# EAGLE board 120W-AB-Amplifier_alt (EAGLE 9.6.2)
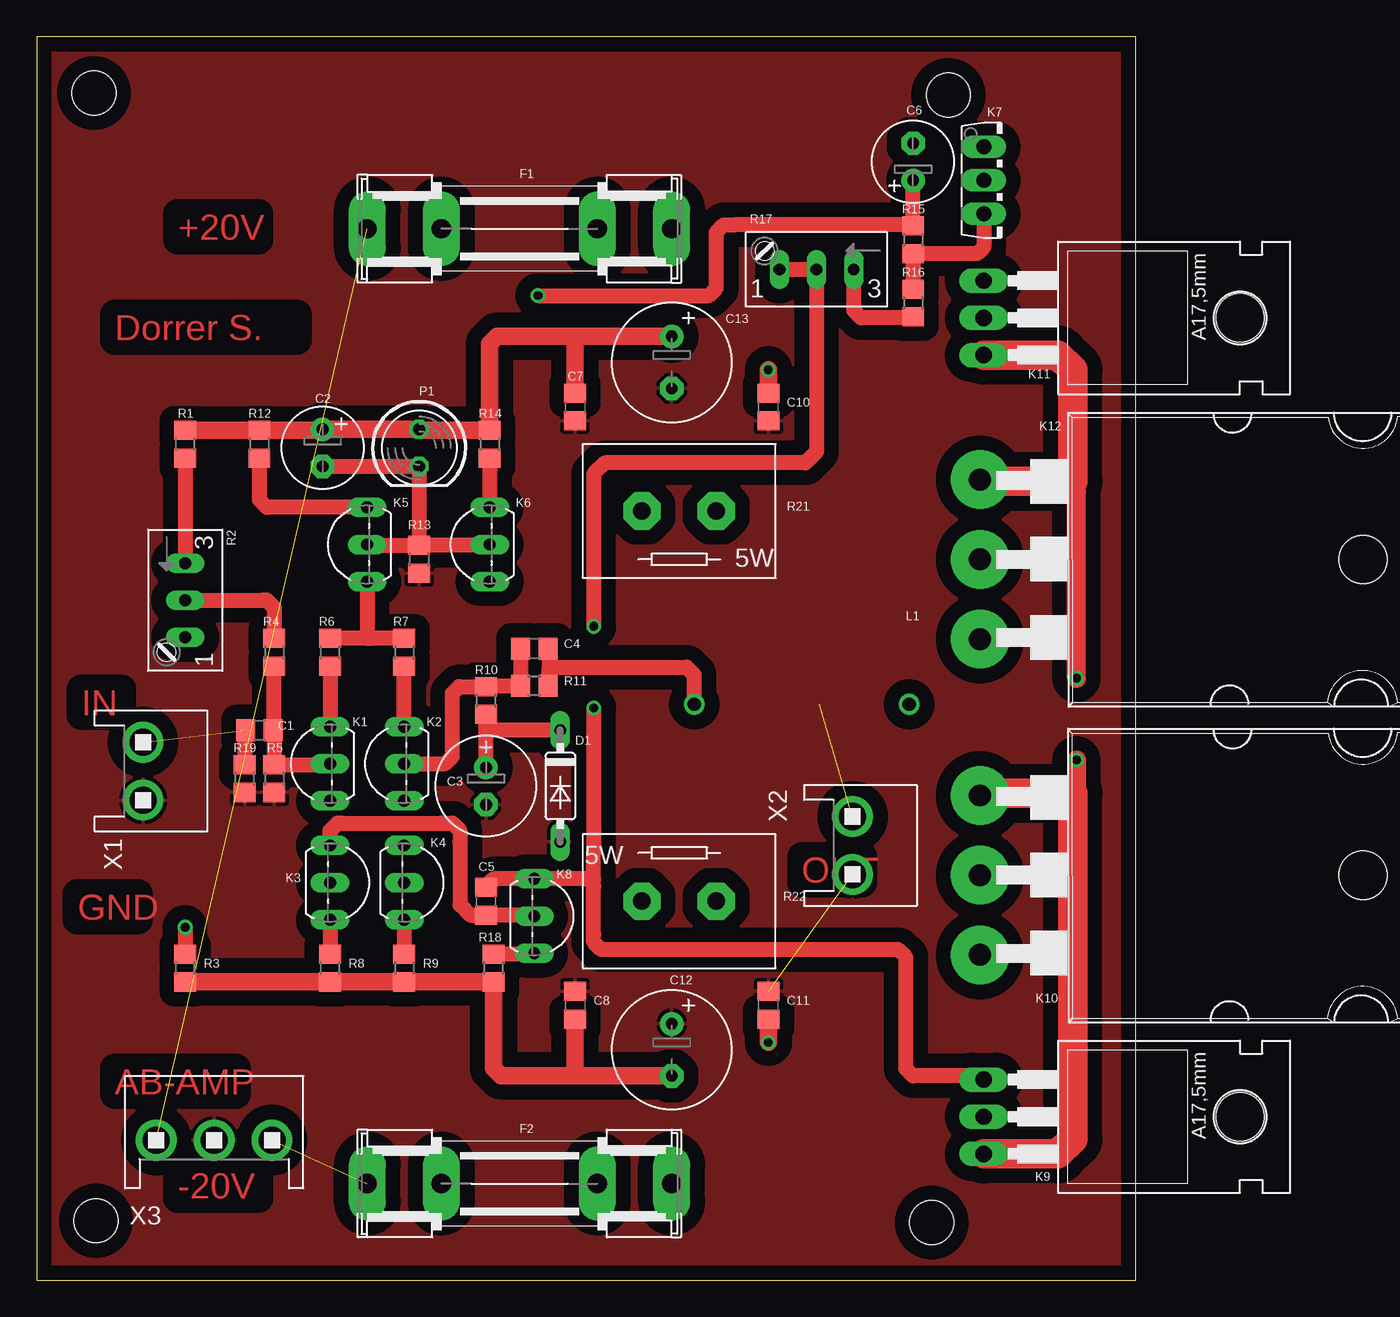
[diagram p0: board, top side]
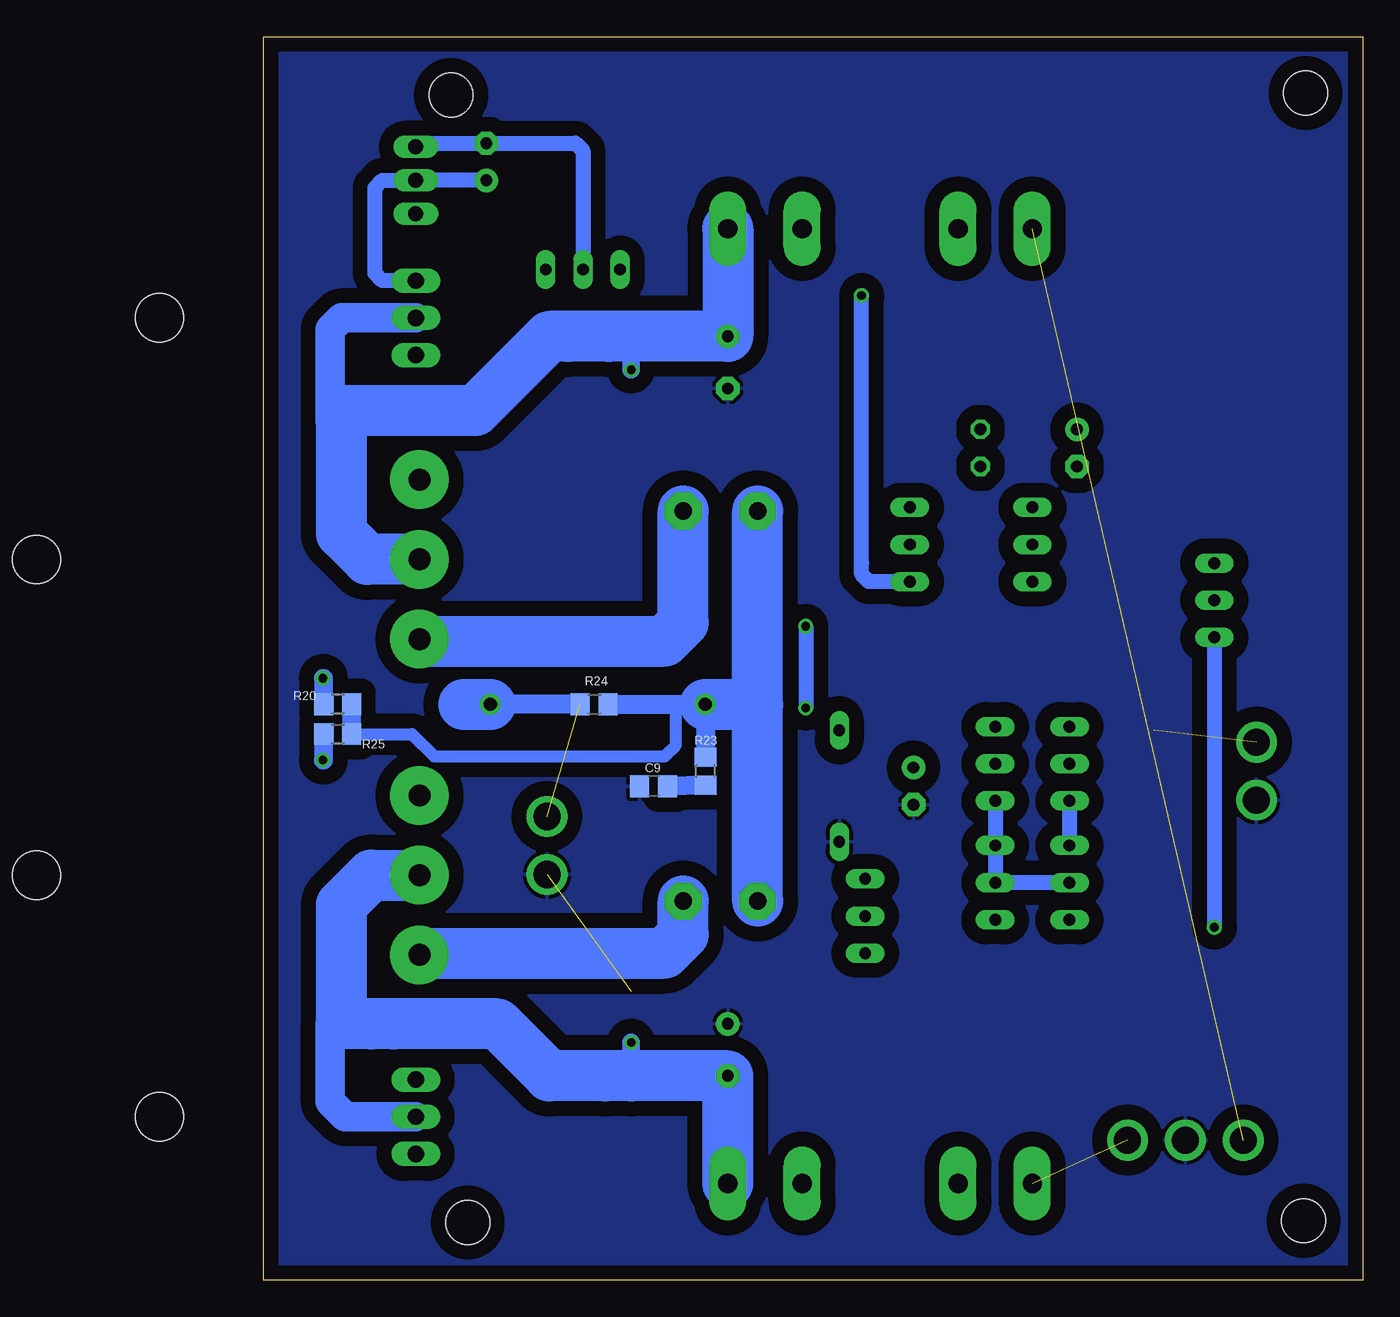
[diagram p1: board, bottom side, seen from below]

Size 75.16 x 85.01 mm. Coordinates in mm from the lower left corner, seen from the top.
Outline: 0,0 75.16,0 75.16,85.01 0,85.01 0,0
Copper layers (1*16): Top 0.035mm / dielectric 1.5mm / Bottom 0.035mm
Design rules "default *": minimum track width 10mil, minimum drill 20mil, track to track 8mil, track to pad 8mil, pad to pad 8mil, via to via 8mil, smd to smd 8mil, copper to edge 20mil, drill to drill 8mil, minimum pad ring 10mil, minimum via ring 8mil, stop-mask expansion 4mil, vias tented up to drill 0mil, thermal gap 10mil
Holes 3 mm at 62.36,81.03 3.94,81.15 61.21,3.94 4.06,4.06

## Footprints (pad centres in the part's own frame; a part is rotated, then mirrored left to right if it is on the bottom)
C0805 = smd 1.3 x 1.5: 1 -0.95,0; 2 0.95,0
E2,5-6 = drill 0.813 pad 1.6: + -1.27,0 | drill 0.813 pad 1.6 octagon: - 1.27,0
E2,5-7 = drill 0.813 pad 1.6: + -1.27,0 | drill 0.813 pad 1.6 octagon: - 1.27,0
E3,5-8 = drill 0.813 pad 1.6: + -1.778,0 | drill 0.813 pad 1.6 octagon: - 1.778,0
DO35-7 = drill 0.813 long: A 3.81,0; C -3.81,0
SHK20L = drill 1.321 pad 2.54 long: 1A -10.414,0; 1B -5.334,0; 2A 10.414,0; 2B 5.334,0
TO92-EBC = drill 0.813 long: B 0,-1.27; C -2.54,-1.27; E 2.54,-1.27
TO92-CBE = drill 0.813 long: B 0,0; C -2.54,0; E 2.54,0
TO126V = drill 1.016 long: 1 -2.286,-1.27; 2 0,-1.27; 3 2.286,-1.27
TO220 = drill 1.118 long: 1 -2.54,-6.35; 2 0,-6.35; 3 2.54,-6.35 | hole 3.302: 0,11.176
TO-264 = drill 1.5 pad 4: B -5.45,-6.096; E 5.45,-6.096 | drill 1.499 pad 4: C 0,-6.096 | hole 3.3: 0,20.09
TJ3-U2 = drill 0.9: 1 -7.35,0; 2 7.35,0
LED5MM = drill 0.813 octagon: A -1.27,0; K 1.27,0
R0805 = smd 1.3 x 1.5: 1 -0.95,0; 2 0.95,0
S64W = drill 0.813 long: A 2.54,1.27; E -2.54,1.27; S 0,1.27
MNS-5 = drill 1.194 pad 2.54 octagon: 1 -2.54,0; 2 2.54,0
VH3.96-2PIN = drill 1.856: 1 -1.98,-4.4; 2 1.98,-4.4
VH3.96-3PIN = drill 1.856: 1 -1.98,-4.4; 2 1.98,-4.4; 3 5.94,-4.4

## Placement (x,y rotation side)
C1  10uF  [C0805]  15.24,37.59 0 top
C2  47µ  [E2,5-6]  19.56,56.9 270 top
C3  100µF  [E2,5-7]  30.73,33.78 270 top
C4  33pF  [C0805]  34.04,43.18 0 top
C5  100pF  [C0805]  30.73,25.91 90 top
C6  47µ  [E2,5-6]  59.94,76.45 90 top
C7  100nF  [C0805]  36.83,59.69 270 top
C8  100nF  [C0805]  36.83,18.8 270 top
C9  100nF  [C0805]  48.51,33.78 0 bottom
C10  100nF  [C0805]  50.04,59.69 270 top
C11  100nF  [C0805]  50.04,18.8 270 top
C12  470uF  [E3,5-8]  43.43,15.75 270 top
C13  470uF  [E3,5-8]  43.43,62.74 270 top
D1  1N4148  [DO35-7]  35.81,33.78 270 top
F1  6.3A  [SHK20L]  33.02,71.88 0 top
F2  6.3A  [SHK20L]  33.02,6.6 0 top
K1  BC557B  [TO92-EBC]  18.8,35.31 90 top
K2  BC557B  [TO92-EBC]  23.88,35.31 90 top
K3  BC547B  [TO92-CBE]  20.07,27.18 270 top
K4  BC547B  [TO92-CBE]  25.15,27.18 270 top
K5  BC557B  [TO92-EBC]  21.34,50.29 90 top
K6  BC557B  [TO92-EBC]  29.72,50.29 90 top
K7  BD139  [TO126V]  66.04,75.18 270 top
K8  BC547B  [TO92-CBE]  34.04,24.89 270 top
K9  2SA1930  [TO220]  71.12,11.18 270 top
K10  2SA1943  [TO-264]  70.61,27.69 270 top
K11  2SC5171  [TO220]  71.12,65.79 270 top
K12  2SC5200  [TO-264]  70.61,49.28 270 top
L1  2.3uH  [TJ3-U2]  52.32,39.37 0 top
P1  Rot  [LED5MM]  26.16,56.9 270 top
R1  39k  [R0805]  10.16,57.15 270 top
R2  5k  [S64W]  8.89,46.48 270 top
R3  39k  [R0805]  10.16,21.34 270 top
R4  10k  [R0805]  16.26,42.93 270 top
R5  10k  [R0805]  16.26,34.29 270 top
R6  100R  [R0805]  20.07,42.93 270 top
R7  100R  [R0805]  25.15,42.93 270 top
R8  68R  [R0805]  20.07,21.34 270 top
R9  68R  [R0805]  25.15,21.34 270 top
R10  10k  [R0805]  30.73,39.62 270 top
R11  47k  [R0805]  34.04,40.64 0 top
R12  330R  [R0805]  15.24,57.15 270 top
R13  1.8k  [R0805]  26.16,49.28 270 top
R14  150R  [R0805]  30.99,57.15 270 top
R15  1.5k  [R0805]  59.94,71.12 270 top
R16  100R  [R0805]  59.94,66.8 270 top
R17  1k  [S64W]  53.34,70.36 180 top
R18  68R  [R0805]  31.24,21.34 270 top
R19  10k  [R0805]  14.22,34.29 270 top
R20  22R  [R0805]  70.1,39.37 180 bottom
R21  0.10R/5W  [MNS-5]  43.94,52.58 0 top
R22  0.10R/5W  [MNS-5]  43.94,25.91 180 top
R23  10R  [R0805]  44.96,34.8 90 bottom
R24  10R  [R0805]  52.58,39.37 0 bottom
R25  22R  [R0805]  70.1,37.34 0 bottom
X1  VH-2A  [VH3.96-2PIN]  11.68,34.8 270 top
X2  VH-2A  [VH3.96-2PIN]  60.2,29.72 270 top
X3  VH-3A  [VH3.96-3PIN]  10.16,13.97 0 top

## Library data of the parts
C1-C13 = rcl; SPICEPREFIX: C
D1 = diode
F1 F2 = fuse; OC_FARNELL: unknown; OC_NEWARK: unknown
K1 K2 K5 K6 = transistor-pnp
K3 K4 K7-K9 K11 = transistor
K10 K12 = TO264
L1 = rcl; SPICEPREFIX: L
P1 = led
R1 R3-R16 R18-R20 R23-R25 = rcl; SPICEPREFIX: R
R2 R17 = pot
R21 R22 = resistor-power; OC_FARNELL: unknown; OC_NEWARK: unknown
X1-X3 = 0_Custom-Lib_Verstärker

## Nets
+18V: C2.+ C7.1 C10.1 C13.+ F1.2A K11.2 K12.C P1.A R1.1 R12.1 R14.1
-18V: C8.2 C11.2 C12.- F2.2A K9.2 K10.C R3.2 R8.2 R9.2 R18.2
AUX_IN: C1.2 K1.B R4.2 R5.1
GND: C3.- C7.2 C8.1 C9.1 C10.2 C11.1 C12.+ C13.- D1.A R5.2 R13.2 R19.2 X1.2 X2.2 X3.2
N$1: K12.E R21.2
N$2: K11.3 K12.B R20.2
N$3: F1.1A X3.1
N$4: K10.E R22.1
N$5: C4.2 L1.1 R11.2 R20.1 R21.1 R22.2 R23.2 R24.2 R25.2
N$7: C5.1 K1.C K3.C K8.B
N$8: R16.2 R17.E
N$9: K7.3 R15.2 R16.1
N$10: C5.2 C6.- K7.1 K8.C K9.1 R17.A R17.S
N$11: C6.+ K6.C K7.2 K11.1 R15.1
N$12: F2.1A X3.3
N$13: K8.E R18.1
N$14: K6.E R14.2
N$15: K5.C R6.1 R7.1
N$16: K5.E R12.2
N$17: C4.1 K2.B R10.1 R11.1
N$18: K4.E R9.1
N$19: C2.- K5.B K6.B P1.K R13.1
N$20: K1.E R6.2
N$21: K3.E R8.1
N$22: K2.E R7.2
N$23: K2.C K3.B K4.B K4.C
N$24: C3.+ D1.C R10.2
N$25: C9.2 R23.1
N$26: C1.1 R19.1 X1.1
N$27: R1.2 R2.E
N$28: K9.3 K10.B R25.1
N$29: R2.S R4.1
N$30: R2.A R3.1
N$31: L1.2 R24.1 X2.1

## Tracks (layer width: path | path; a pad name or v marks a point on that pad's centre or on a via)
+18V  (via drill 0.6)
  Top 1.2: R1.1 R12.1 19.49,58.1 C2.+ P1.A 26.23,58.1 R14.1 30.99,64.01 31.43,64.45 31.5,64.52 36.83,64.52 | 43.37,64.45 C13.+ 36.83,64.52 | C7.1 36.83,64.52 | C10.1 v50.04,62.23
  Bottom 1.2: v50.04,62.23 50.04,64.52
  Bottom 2: K11.2 67.82,65.79 69.85,65.79 70.61,65.02 70.61,58.67 70.1,59.18 69.85,59.18
  Bottom 3.5: F1.2A C13.+ 50.04,64.52 51.56,64.52 54.36,64.52 55.63,64.52 60.71,59.44 69.85,59.44 69.85,59.18 69.85,51.05 68.07,49.28 K12.C
-18V  (via drill 0.6)
  Top 1.2: R3.2 R8.2 R9.2 R18.2 31.24,14.48 31.75,13.97 36.83,13.97 | 36.83,13.97 C12.- | C11.2 v50.04,16.26 | C8.2 36.83,13.97
  Bottom 1.016: 68.33,11.18 68.58,11.18
  Bottom 1.2: v50.04,16.26 50.04,13.97
  Bottom 2: K9.2 68.07,11.18 68.33,11.18 | 68.58,11.18 69.6,11.18 70.61,12.19 70.61,17.53 69.85,17.53
  Bottom 3.5: F2.2A C12.- 50.04,13.97 51.82,13.97 55.63,13.97 59.18,17.53 66.29,17.53 67.82,17.53 69.85,17.53 69.85,19.81 | K10.C 67.82,27.69 69.85,25.65 69.85,19.81 | 69.85,19.56 69.85,19.81
AUX_IN
  Top 1.016: K1.B 20.07,35.24 R5.1 16.26,37.59 C1.2 16.26,37.66 R4.2
GND  (1 unrouted)
  pour Bottom (isolate 1.016): 0,0 0,84.96 75.18,84.71 75.18,-0.25
  pour Top (isolate 1.016): -0.13,-0.25 -0.13,85.22 75.31,85.22 75.31,-0.25
N$1
  Bottom 3.5: K12.E 64.38,43.69 47.75,43.69 46.48,44.96 R21.2
N$2  (via drill 0.6)
  Top 1.3: v71.12,41.15 71.12,53.85 70.87,54.1 70.87,54.61
  Top 2: K12.B 64.63,54.61 70.87,54.61 70.87,62.23 69.85,63.25 K11.3
  Bottom 1.27: v71.12,41.15 71.05,41.15 R20.2
N$3  (1 unrouted)
N$4
  Bottom 3.5: K10.E 64.4,22.35 47.75,22.35 46.48,23.62 R22.1
N$5
  Top 1.016: C4.2 35.05,43.11 35.05,41.91 | R11.2 35.05,40.71 35.05,41.91 | 35.05,41.91 44.45,41.91 44.97,41.39 L1.1
  Bottom 0.508: R20.1 69.09,39.3 69.09,37.34
  Bottom 0.813: 46.99,39.37 46.99,36.58 47.75,35.81 63.5,35.81 65.02,37.34 69.09,37.34
  Bottom 1.27: R20.1 R25.2
  Bottom 1.3: R24.2 46.99,39.37 L1.1 44.96,39.35 R23.2
  Bottom 3.5: R22.2 41.4,39.37 | 41.4,39.37 R21.1 | L1.1 41.4,39.37
N$7
  Top 1.016: K8.B 34.48,24.96 C5.1 | C5.1 30.67,24.89 | K3.C 20.07,30.48 20.07,30.73 20.57,31.24 20.83,31.24 27.69,31.24 28.45,31.24 28.96,30.73 28.96,29.97 28.96,25.65 29.65,24.96 C5.1
  Bottom 1.016: K1.C K3.C
N$8
  Top 1.016: R16.2 59.88,65.79 56.39,65.79 55.88,66.29 R17.E
N$9
  Top 1.016: R16.1 R15.2 64.33,70.17 64.77,70.61 K7.3
N$10  (via drill 0.6)
  Top 1.016: C5.2 30.73,26.92 31.24,27.43 31.5,27.43 K8.C 37.59,27.43 38.1,27.43 | K9.1 64.52,13.97 59.94,13.97 59.44,14.48 59.44,21.08 59.44,22.1 58.93,22.61 57.91,22.61 39.12,22.61 38.61,22.61 38.1,23.11 38.1,23.62 38.1,26.92 38.1,27.43 | 38.1,27.43 38.1,29.21 38.1,31.24 | R17.A R17.S 53.34,57.4 53.34,56.64 52.58,55.88 38.86,55.88 38.1,55.12 v38.1,44.7 | 38.1,31.75 38.1,31.24 | v38.1,39.12 38.1,31.24
  Bottom 1.016: K7.1 64.52,77.72 C6.- 53.85,77.72 53.34,77.22 R17.S | v38.1,44.7 v38.1,39.12
N$11  (via drill 0.6)
  Top 1.016: R15.1 59.88,72.14 | 59.88,72.14 47.75,72.14 46.99,72.14 46.48,71.63 46.48,67.82 45.97,67.31 v34.29,67.31 | 59.88,72.14 59.94,72.2 C6.+
  Bottom 1.016: C6.+ K7.2 67.06,75.18 67.56,74.68 67.56,69.34 67.56,68.83 67.06,68.33 66.55,68.33 K11.1 | K6.C 33.02,47.75 33.78,47.75 34.29,48.26 34.29,49.02 v34.29,67.31
N$12  (1 unrouted)
N$13
  Top 1.016: K8.E 33.97,22.29 R18.1
N$14
  Top 1.016: R14.2 K6.E
N$15
  Top 1.016: R7.1 22.86,43.88 22.61,43.88 | 22.61,43.88 R6.1 | 22.61,43.88 22.61,47.5 K5.C
N$16
  Top 1.016: K5.E 15.75,52.83 15.24,53.34 R12.2
N$17
  Top 1.016: C4.1 R11.1 30.8,40.64 R10.1 28.89,40.57 28.45,40.13 28.45,35.81 27.94,35.31 K2.B
N$18
  Top 1.016: K4.E R9.1
N$19
  Top 1.016: R13.1 26.23,50.29 | R13.1 P1.K C2.- | K6.B 30.92,50.23 R13.1 | K5.B 22.42,50.23 R13.1
N$20
  Top 1.016: R6.2 K1.E
N$21
  Top 1.016: K3.E R8.1
N$22
  Top 1.016: K2.E R7.2
N$23
  Bottom 1.016: K3.B K4.B K4.C K2.C
N$24
  Top 1.016: C3.+ 30.73,37.59 | 30.73,37.59 30.73,38.1 R10.2 | D1.C 30.73,37.59
N$25
  Bottom 1.3: R23.1 C9.2
N$26  (1 unrouted)
  Top 1.016: 14.22,35.28 R19.1 14.22,37.59 C1.1
N$27
  Top 1.016: R1.2 R2.E
N$28  (via drill 0.6)
  Top 1.3: v71.12,35.56 71.12,33.78 70.87,33.53 70.87,33.27
  Top 2: K10.B 64.65,33.27 70.87,33.27 70.87,9.65 69.85,8.64 K9.3
  Bottom 1.27: v71.12,35.56 71.05,35.56 R25.1
N$29
  Top 1.016: R2.S 15.49,46.48 15.75,46.48 16.26,45.97 R4.1
N$30  (via drill 0.6)
  Top 1.016: v10.16,24.13 R3.1
  Bottom 1.016: R2.A v10.16,24.13
N$31  (1 unrouted)
  Bottom 1.3: R24.1 L1.2
  Bottom 3.5: 61.47,39.37 L1.2

## Text on the board
Top: +20V | Dorrer S. | IN | OUT | GND | AB-AMP | -20V